# EAGLE board SmartCam (EAGLE 9.0.1)
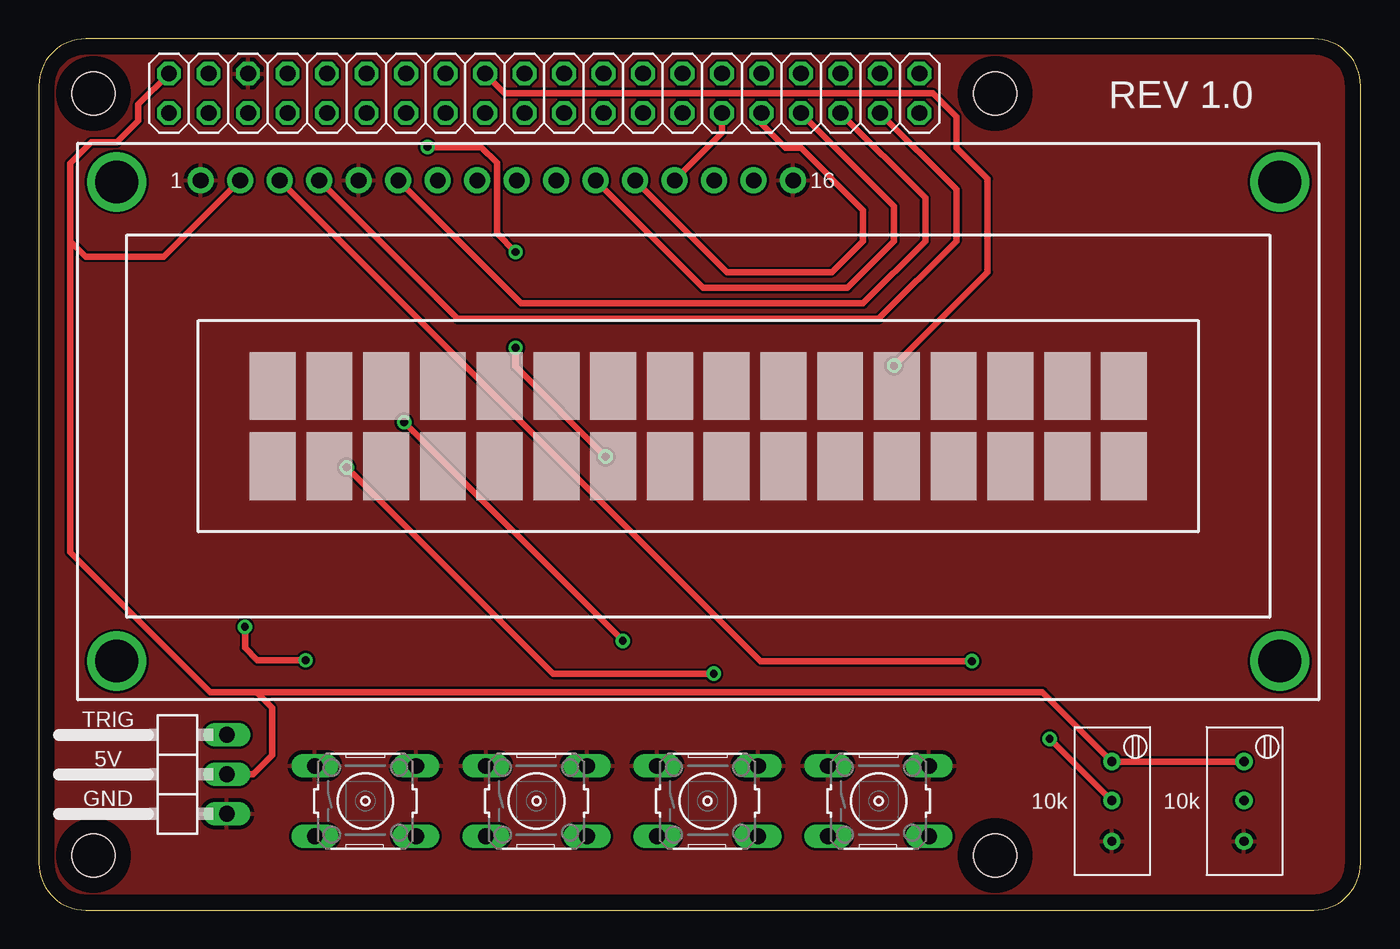
[diagram p0: board, top side]
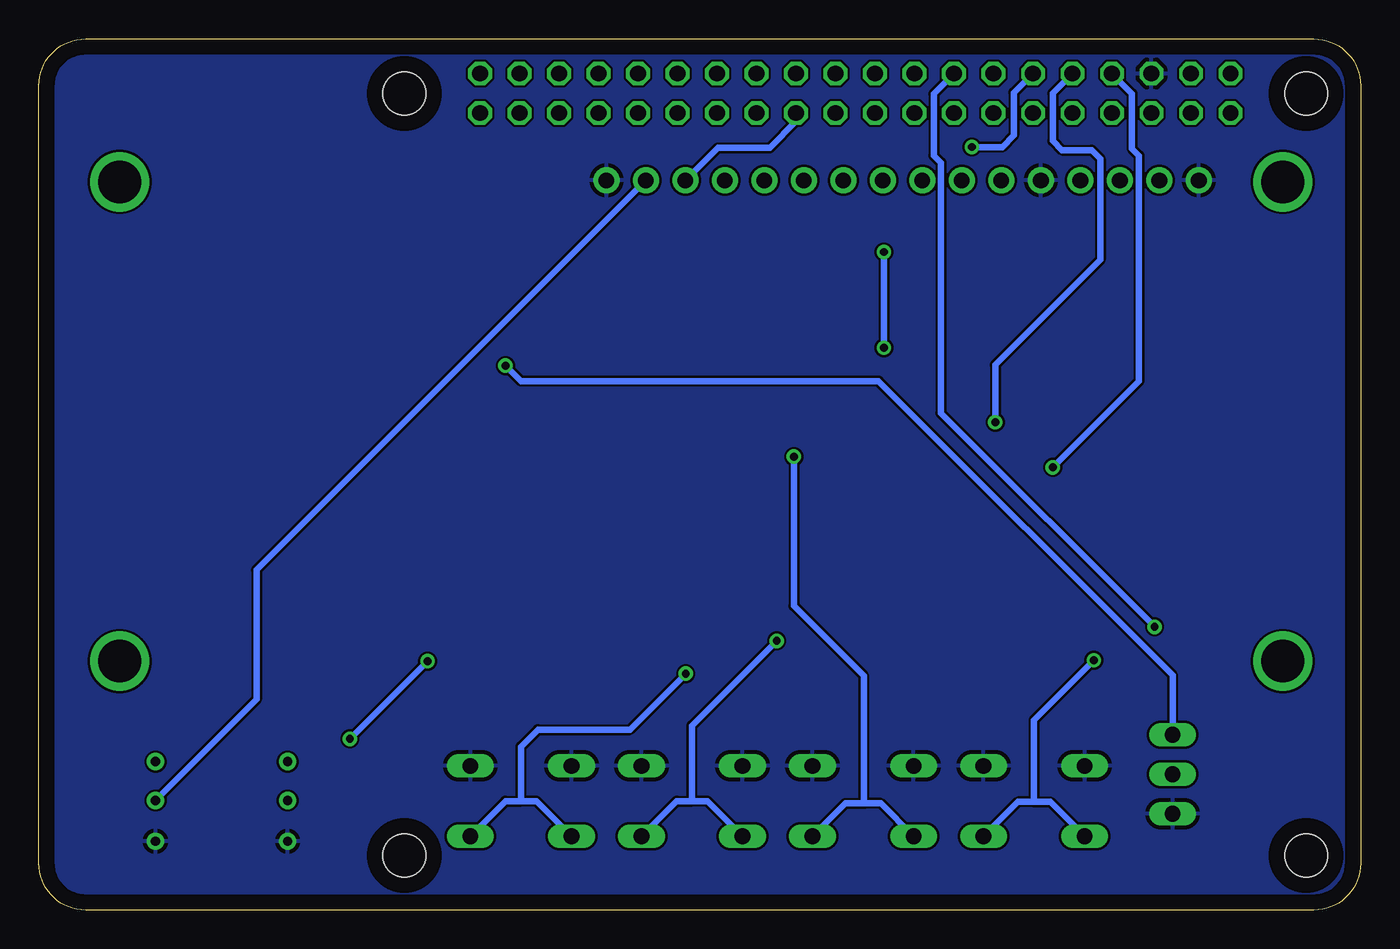
[diagram p1: board, bottom side, seen from below]

Size 85 x 56 mm. Coordinates in mm from the lower left corner, seen from the top.
Outline: 0,53 0,3 arc90 3,0 82,0 arc90 85,3 85,53 arc90 82,56 3,56 arc90 0,53
Copper layers (1*16): Top 0.035mm / dielectric 1.5mm / Bottom 0.035mm
Design rules "default *": minimum track width 6mil, minimum drill 0.35mm, track to track 6mil, track to pad 6mil, pad to pad 6mil, via to via 6mil, smd to smd 6mil, copper to edge 40mil, drill to drill 8mil, minimum pad ring 10mil, minimum via ring 8mil, stop-mask expansion 4mil, vias tented up to drill 0mil, thermal gap 10mil
Holes 2.75 mm at 3.5,3.5 3.5,52.5 61.5,52.5 61.5,3.5

## Footprints (pad centres in the part's own frame; a part is rotated, then mirrored left to right if it is on the bottom)
LCD_16X2_HD44780 = drill 1 pad 1.676: 1 7.904,33.406; 2 10.444,33.406; 3 12.984,33.406; 4 15.524,33.406; 5 18.064,33.406; 6 20.604,33.406; 7 23.144,33.406; 8 25.684,33.406; 9 28.224,33.406; 10 30.764,33.406; 11 33.304,33.406; 12 35.844,33.406; 13 38.384,33.406; 14 40.924,33.406; 15 43.464,33.406; 16 46.004,33.406 | drill 2.75 pad 3.81: P$1 2.504,33.306; P$2 77.304,33.306; P$3 2.504,2.506; P$4 77.304,2.506
2X20 = drill 1.016 octagon: 1 -24.13,-1.27; 2 -24.13,1.27; 3 -21.59,-1.27; 4 -21.59,1.27; 5 -19.05,-1.27; 6 -19.05,1.27; 7 -16.51,-1.27; 8 -16.51,1.27; 9 -13.97,-1.27; 10 -13.97,1.27; 11 -11.43,-1.27; 12 -11.43,1.27; 13 -8.89,-1.27; 14 -8.89,1.27; 15 -6.35,-1.27; 16 -6.35,1.27; 17 -3.81,-1.27; 18 -3.81,1.27; 19 -1.27,-1.27; 20 -1.27,1.27; 21 1.27,-1.27; 22 1.27,1.27; 23 3.81,-1.27; 24 3.81,1.27; 25 6.35,-1.27; 26 6.35,1.27; 27 8.89,-1.27; 28 8.89,1.27; 29 11.43,-1.27; 30 11.43,1.27; 31 13.97,-1.27; 32 13.97,1.27; 33 16.51,-1.27; 34 16.51,1.27; 35 19.05,-1.27; 36 19.05,1.27; 37 21.59,-1.27; 38 21.59,1.27; 39 24.13,-1.27; 40 24.13,1.27
1X03/90 = drill 1.016 long: 1 -2.54,-3.81; 2 0,-3.81; 3 2.54,-3.81
BOURNS_WEL3296_W_103 = drill 0.6: P$1 -2.54,0; P$2 -0.04,0; P$3 2.58,0
B3F-10XX = drill 1.016 long: 1 -3.251,2.261; 2 3.251,2.261; 3 -3.251,-2.261; 4 3.251,-2.261

## Placement (x,y rotation side)
DISP1  LCD_16X2_HD44780  [LCD_16X2_HD44780]  2.5,13.5 0 top
JP1  GPIO  [2X20]  32.5,52.5 0 top
JP2  [1X03/90]  8.28,8.72 90 top
POT1  10k  [BOURNS_WEL3296_W_103]  69,7 270 top
POT2  10k  [BOURNS_WEL3296_W_103]  77.5,7 270 top
S1  ML  [B3F-10XX]  54,7 0 top
S2  UR  [B3F-10XX]  43,7 0 top
S3  UL  [B3F-10XX]  32,7 0 top
S4  MR  [B3F-10XX]  21,7 0 top

## Library data of the parts
DISP1 = LCD_16x2_HD44780
JP1 JP2 = pinhead
POT1 POT2 = BOURNS_WEL3296_W_103
S1-S4 = switch-omron; MPN: B3F-1000; OC_FARNELL: 176432; OC_NEWARK: 36M3542

## Nets
DB4: DISP1.11 JP1.33
DB5: DISP1.12 JP1.31
DB6: DISP1.13 JP1.29
DB7: DISP1.14 JP1.23
E: DISP1.6 JP1.35
GND: DISP1.1 DISP1.5 DISP1.16 JP1.6 JP2.1 POT1.P$3 POT2.P$3 S1.1 S1.2 S2.1 S2.2 S3.1 S3.2 S4.1 S4.2
LED+: DISP1.15 POT2.P$2
ML: JP1.8 S1.3 S1.4
MR: JP1.16 S4.3 S4.4
RS: DISP1.4 JP1.37
TRIG: JP1.18 JP2.3
UL: JP1.12 S3.3 S3.4
UR: JP1.10 S2.3 S2.4
V+: DISP1.2 JP1.2 JP2.2 POT1.P$1 POT2.P$1
VO: DISP1.3 POT1.P$2

## Tracks (layer width: path | path; a pad name or v marks a point on that pad's centre or on a via)
DB4
  Top 0.406: DISP1.11 42.71,40 52,40 55,43 55,45.24 JP1.33
DB5
  Top 0.406: DISP1.12 44.25,41 51,41 53,43 53,45 49,49 48,49 46.47,50.53 JP1.31
DB6
  Top 0.406: DISP1.13 43.93,49.95 JP1.29
DB7
  Bottom 0.406: DISP1.14 41.33,49 38,49 36.31,50.69 JP1.23
E
  Top 0.406: DISP1.6 31.01,39 53,39 57,43 57,45.78 JP1.35
GND
  pour Top: -2,55 -2,-2 87,-2 87,57 -2,57
  pour Bottom: -1,55 -1,-1 86,-1 86,57 -1,57
LED+
  Bottom 0.406: DISP1.15 71,21.87 71,13.54 POT2.P$2
ML  (via drill 0.51)
  Top 0.406: v19.8,28.45 33.05,15.2 v43.4,15.2
  Bottom 0.406: JP1.8 14.7,52.48 14.7,48.95 14.25,48.5 14.25,34 v19.8,28.45 | v43.4,15.2 47,11.6 52.9,11.6 54,10.5 54,7 | S1.3 53.01,7 54,7 | S1.4 54.99,7 54,7
MR  (via drill 0.51)
  Top 0.406: v13.25,18.2 13.25,16.85 14.05,16.05 v17.15,16.05
  Bottom 0.406: JP1.16 27.45,52.47 27.45,48.5 26.99,48.04 26.99,46.41 27,46.4 27,31.95 v13.25,18.2 | v17.15,16.05 21,12.2 21,6.95 | 21,6.95 19.96,6.95 S4.3 | 21,6.95 22.04,6.95 S4.4
RS
  Top 0.406: DISP1.4 26.93,38 54,38 59,43 59,46.32 JP1.37
TRIG  (via drill 0.51)
  Top 0.406: JP1.18 29.96,52.5 57.5,52.5 59,51 59,49 61,47 61,41 v55,35
  Bottom 0.406: JP2.3 12.09,15.09 31,34 54,34 v55,35
UL  (via drill 0.51)
  Top 0.406: v25,49.05 28.45,49.05 29.45,48.05 29.45,43.5 v30.65,42.3 | v30.65,36.15 30.65,34.95 v36.45,29.15
  Bottom 0.406: JP1.12 22.3,52.54 22.3,49.8 23.05,49.05 v25,49.05 | v30.65,42.3 v30.65,36.15 | v36.45,29.15 36.45,19.55 31.95,15.05 31.95,6.9 31.9,6.85 | S3.3 30.86,6.85 31.9,6.85 | S3.4 33.14,6.85 31.9,6.85
UR  (via drill 0.51)
  Top 0.406: v23.5,31.35 v37.55,17.3
  Bottom 0.406: JP1.10 19.8,52.5 19.8,49.45 19.2,48.85 17.3,48.85 16.75,48.3 16.75,41.8 23.5,35.05 v23.5,31.35 | v37.55,17.3 43,11.85 43,7 | S2.3 42.01,7 43,7 | S2.4 43.99,7 43,7
V+
  Top 0.406: POT2.P$1 POT1.P$1 64.54,14 14,14 | 2,43 2,23 11,14 14,14 | 14,14 15,13 15,9.95 13.77,8.72 JP2.2 | DISP1.2 8.04,42 3,42 2,43 | JP1.2 6.4,51.8 6.4,50.75 5,49.35 3.35,49.35 2,48 2,43
VO  (via drill 0.51)
  Top 0.406: DISP1.3 46.39,16 v60,16 | v65,11 68.96,7.04 POT1.P$2
  Bottom 0.406: v60,16 v65,11

## Text on the board
tPlace: REV 1.0 | 1 | 16 | TRIG | 5V | GND | 10k | 10k